# Altium PCB PCB1.PcbDoc
Units mm, origin at the board's own origin, x right, y up, seen from the top; angles counter-clockwise.
Board outline 95 x 95 mm, 2 copper layers (Top Layer, Bottom Layer); 15 components, 6 nets, 38 pads, 15 vias.
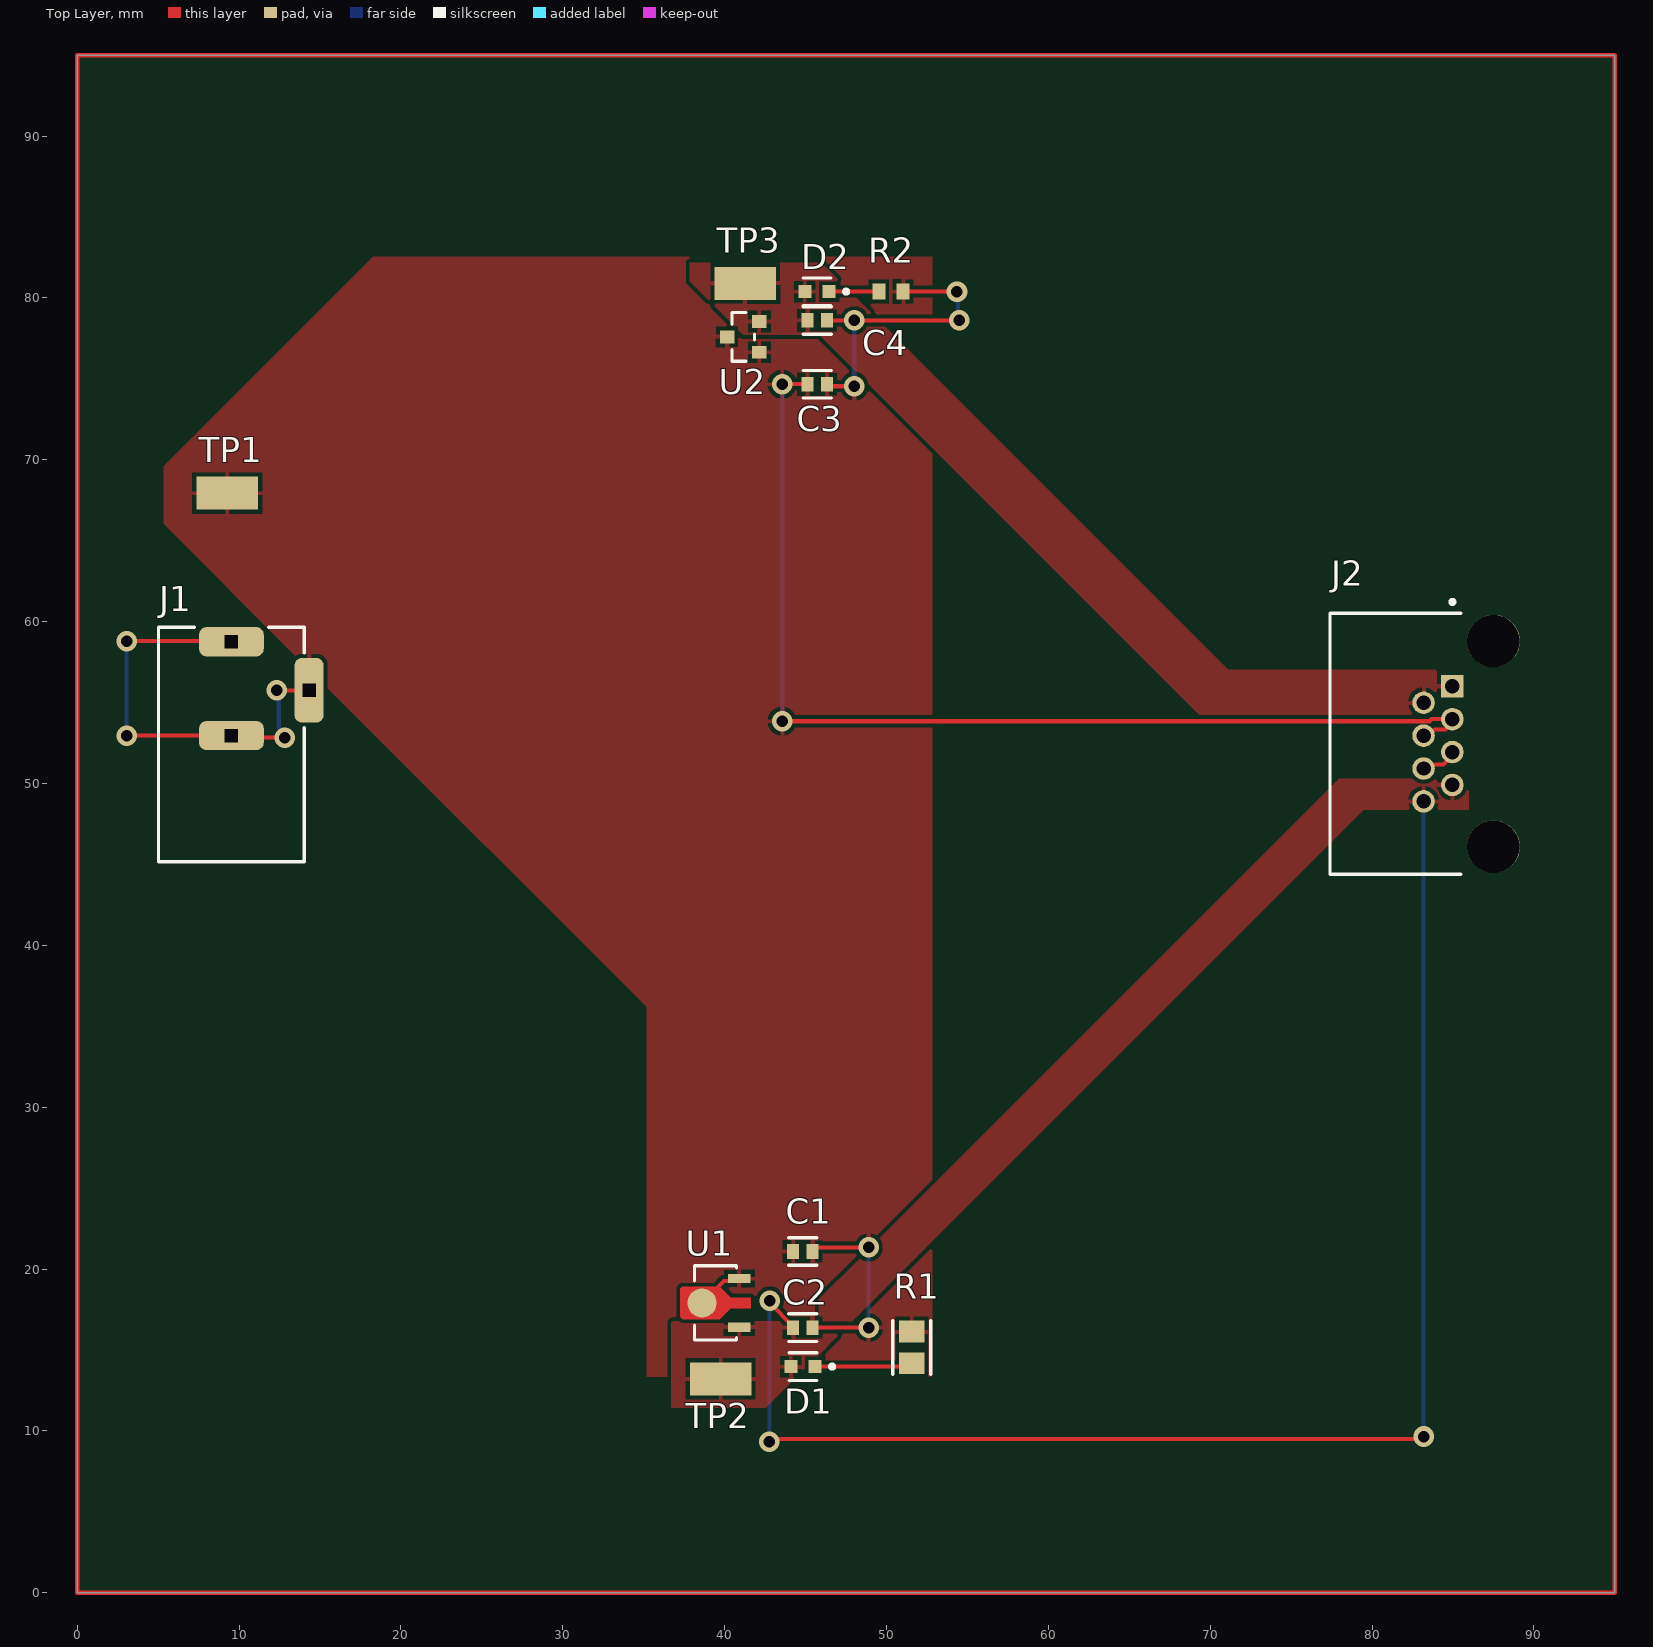
[diagram p0: Top Layer view]
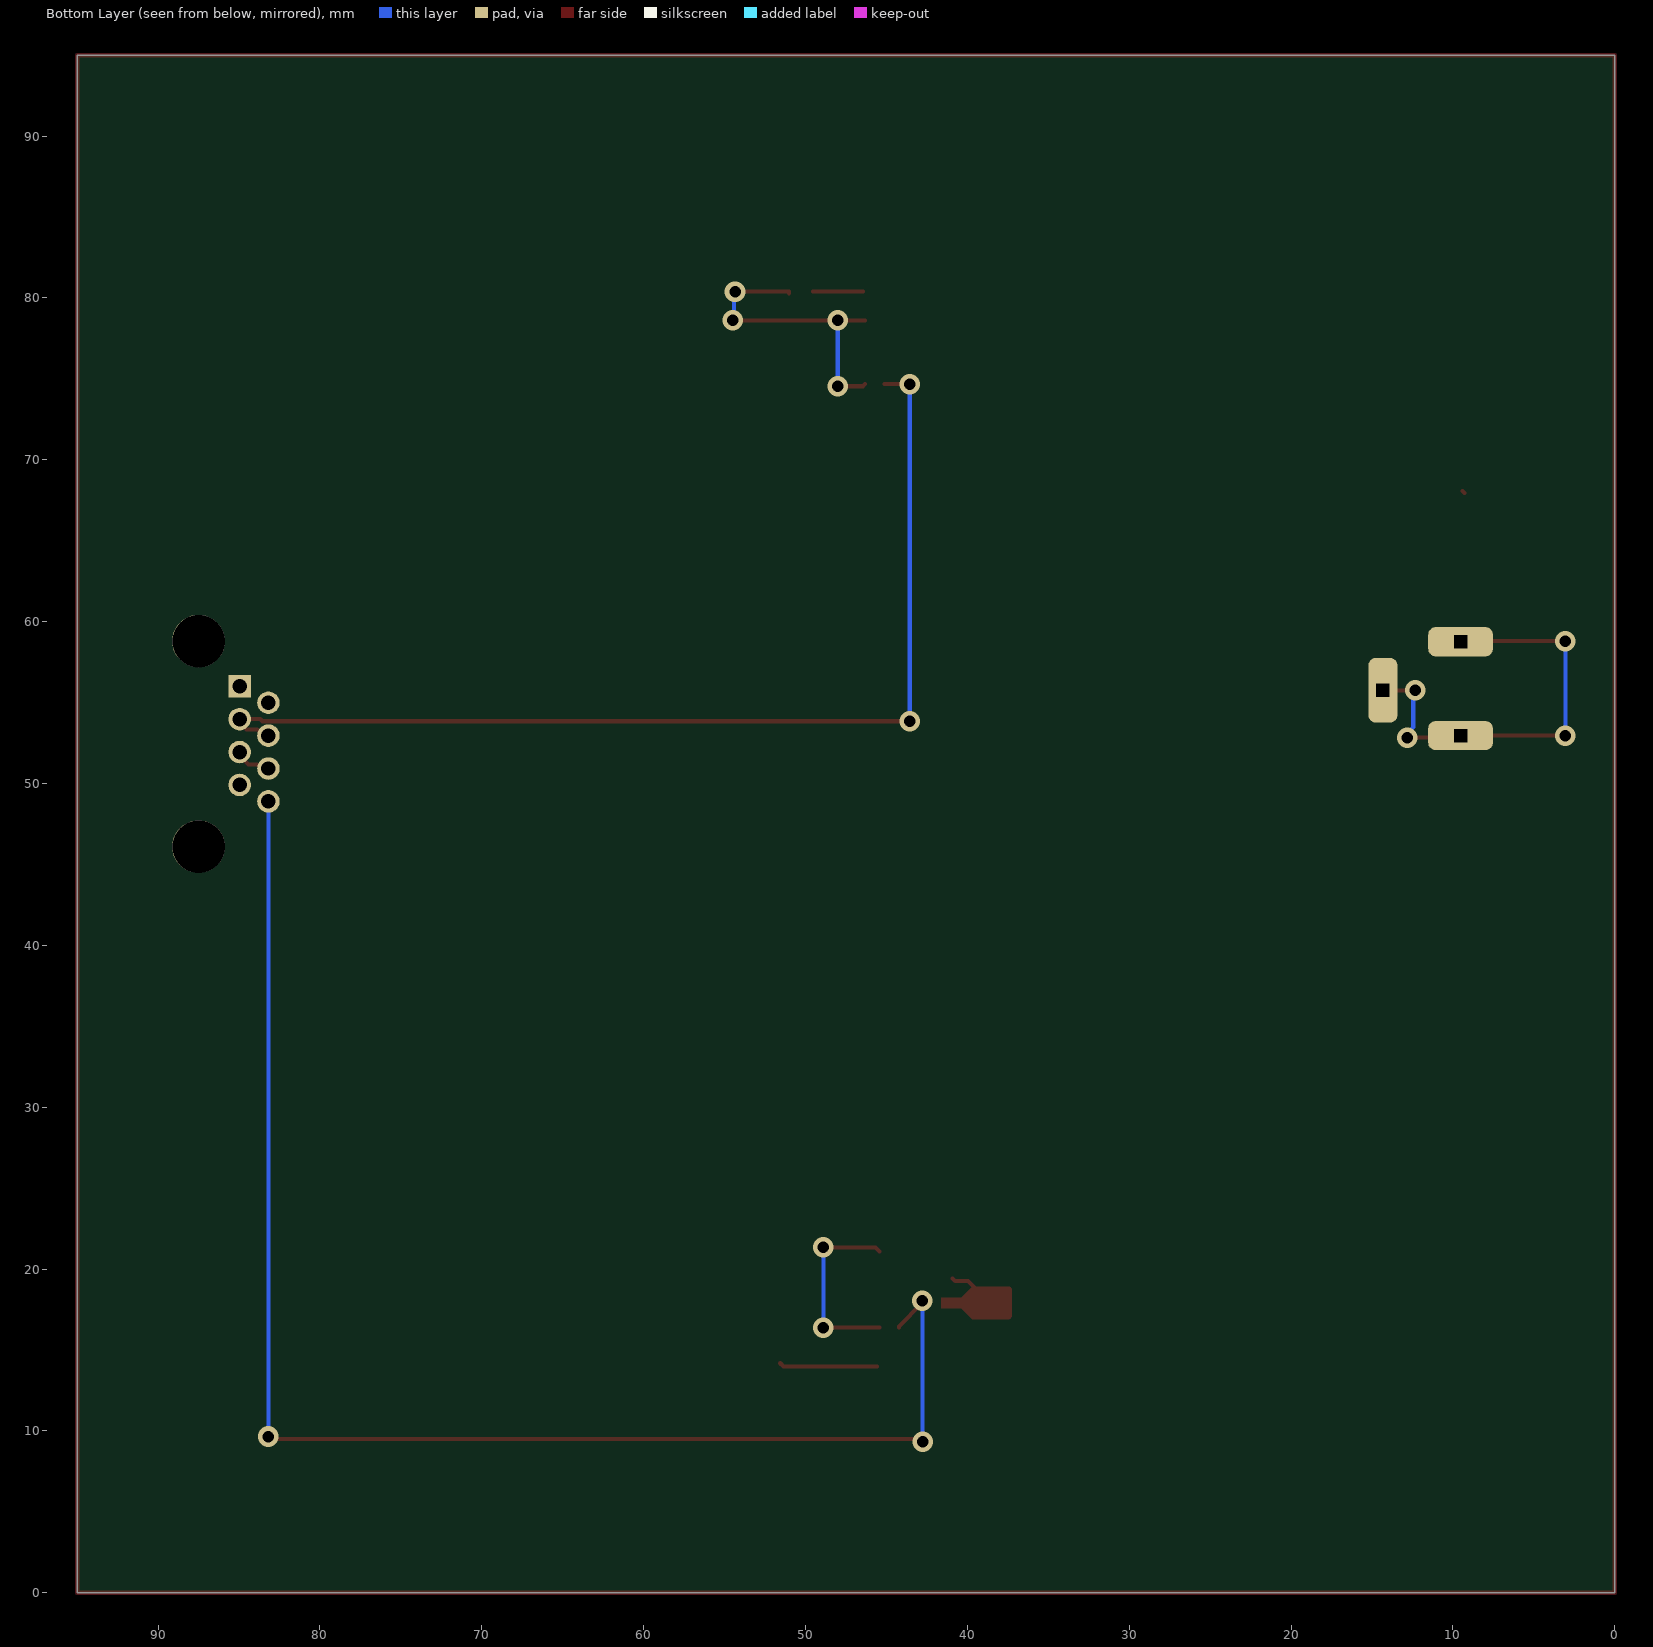
[diagram p1: Bottom Layer view, seen from below]
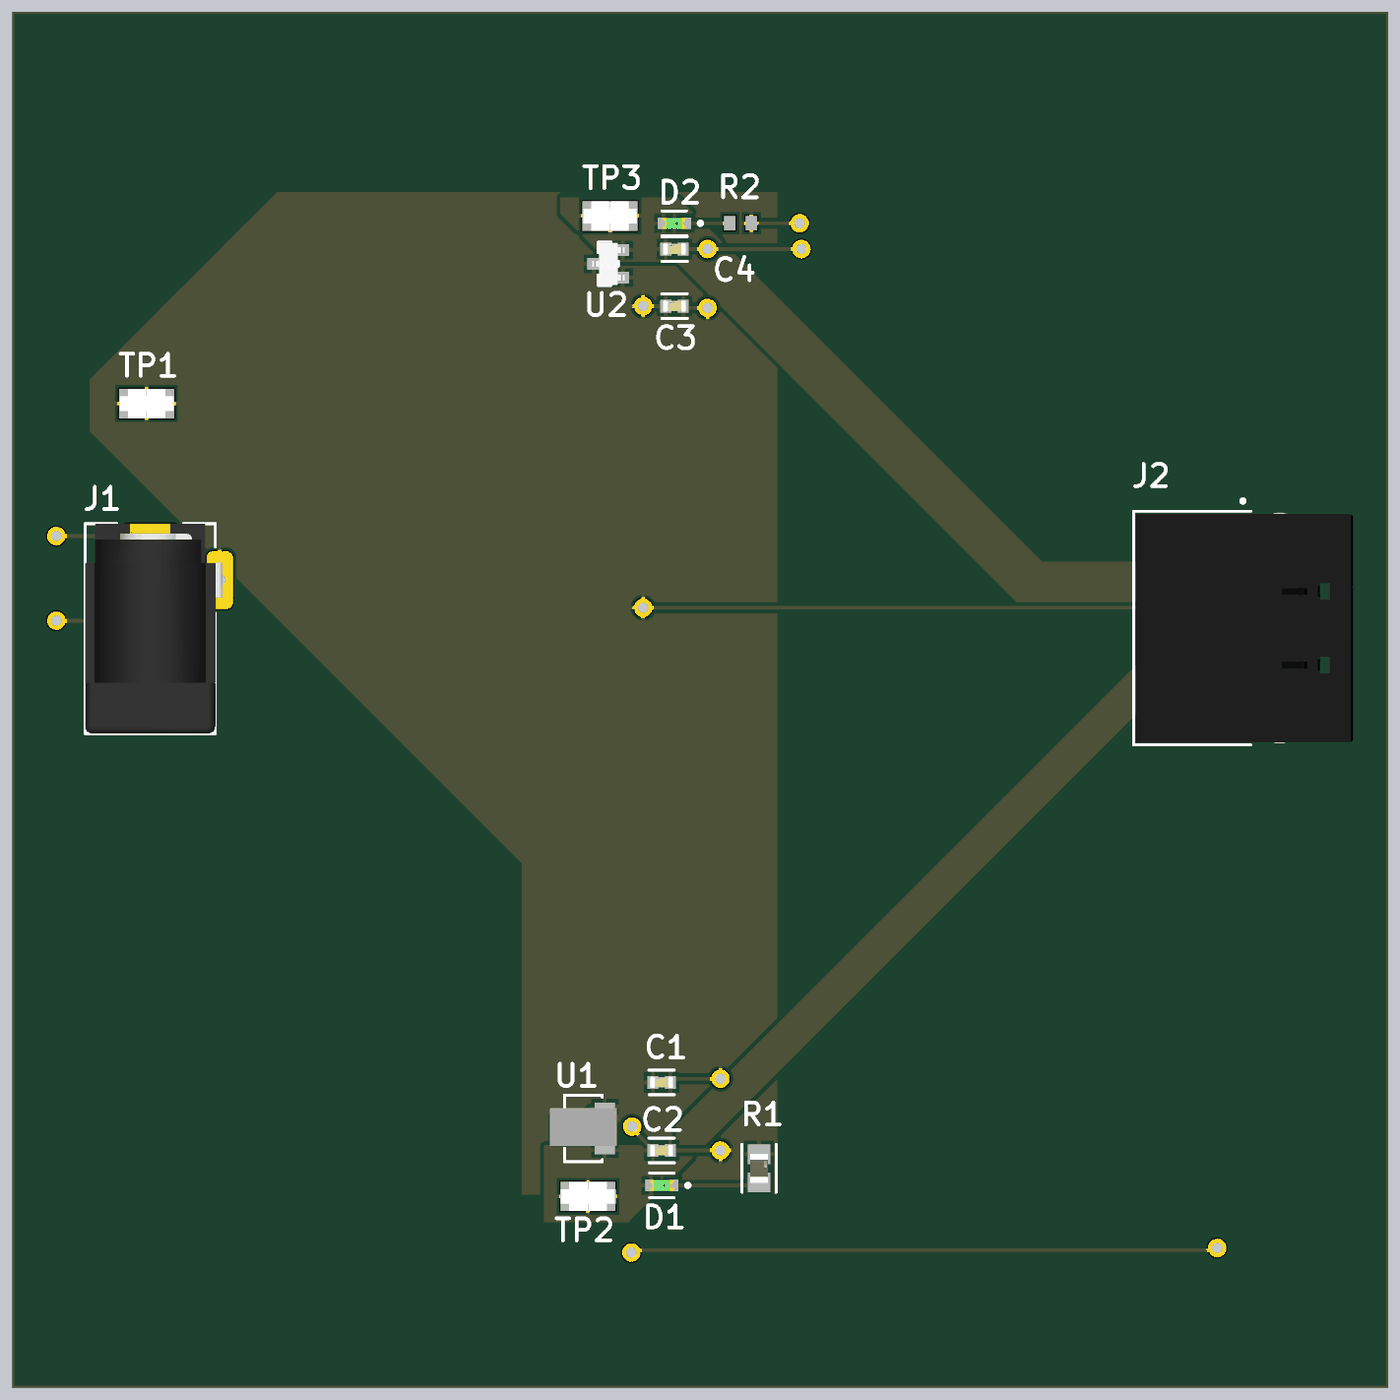
[diagram p2: 3D render of the assembled board from above, using the file's embedded part models]

## Layer stack, top to bottom
Top Solder: solder mask 0.0102, Solder Resist, Dk 3.5
Top Layer: signal copper 0.0356
Dielectric 1: dielectric 0.32, FR-4, Dk 4.8
Bottom Layer: signal copper 0.0356
Bottom Solder: solder mask 0.0102, Solder Resist, Dk 3.5

## Board outline
0,0 0,94.996 94.996,94.996 94.996,0

## Design rules (kind name [scope] priority, off if disabled: settings)
Clearance [All] p1: gap=0.254 ignorepadtopadclearanceinfootprint=FALSE except(0: Arc-Hole Track-Hole SMDPad-Hole THPad-Hole Via-Hole Fill-Hole Poly-Hole Region-Hole Text-Hole)
PolygonConnect [All] p1: connectstyle=Relief reliefconductorwidth=0.254 reliefentries=4 polygonreliefangle="90 Angle" airgapwidth=0.254
RoutingVias [All] p1: holewidth=0.711 width=1.27 viastyle="Through Hole" minholewidth=0.711 minwidth=1.27 maxholewidth=0.711 maxwidth=1.27
SolderMaskExpansion [All] p1: expansion=0.102 istentingtop=FALSE
Width [All] p1: maxlimit=0.254 minlimit=0.254 preferedwidth=0.254
30 further rules are at their usual default settings.

## Classes and differential pairs
component class Connectors: J2
component class Power_Supply_no_IC: J1
component class Buck_Converters: C1 C2 C3 C4 D1 D2 R1 R2 TP1 TP2 TP3 U1 U2

## Components (designator, comment, footprint, x,y, rotation, side; value= is the part's Value field where it differs from the comment)
C1 "C0603C104K5RACTU" FP-C0603C-CF-MFG 44.831,21.082 r0 top value="0.10 μF"
C2 "C0603C104K5RACTU" FP-C0603C-CF-MFG 44.831,16.383 r0 top value="0.10 μF"
C3 "C0603C104K5RACTU" FP-C0603C-CF-MFG 45.72,74.676 r0 top value="0.10 μF"
C4 "C0603C104K5RACTU" FP-C0603C-CF-MFG 45.72,78.613 r0 top value="0.10 μF"
D1 "LTST-C190GKT" FP-LTST-C190GKT-MFG 44.843,13.97 r180 top
D2 "LTST-C190GKT" FP-LTST-C190GKT-MFG 45.708,80.391 r180 top
J1 "694106301002" 694106301002 9.525,52.409 r0 top
J2 "RJHSE-5080" FP-RJHSE-5080-MFG 85.09,52.451 r90 top
R1 "RG2012P-202-B-T5" FP-RG2012-IPC_A 51.562,15.153 r90 top value=2kR
R2 "RT0603BRE071KL" RESC1608X55X25ML10T15 50.28,80.391 r180 top value=1kR
TP1 "BAT+" KSTN-5019_V 9.271,67.945 r0 top
TP2 "5V" KSTN-5019_V 39.751,13.208 r0 top
TP3 "3V3" KSTN-5019_V 41.275,80.899 r0 top
U1 "L78L05ACUTR" FP-SOT-89-7098166-MFG 39.433,18.007 r90 top
U2 "AP2120N-3.3TRG1" FP-SOT23-MFG 41.148,77.597 r180 top

## Footprints (in the part's own frame and the unit in brackets; to place one, negate y for a bottom-side part, rotate by r counter-clockwise, add the part's x,y. Pads: shape width x height; smd on the part's side, far side on the other; paste and mask are expansions set on the pad)
694106301002 [mm] "DC Power Jack Right Angled(6.4)"
  rrect50% 4x1.8 hole 0.8 square: 1(0,6.35) 2(0,0.55)
  rrect50% 1.8x4 hole 0.8 square: 3(4.8,3.35)
  silkscreen extent -4.5,-7.25 4.5,7.25, body extent -4.5,-7.25 5,7.25, height 10.75
FP-C0603C-CF-MFG [mm]
  rect 0.75x0.9 smd paste+0 mask+0: 1(-0.6,0) 2(0.6,0)
  silkscreen extent -0.87,-0.85 0.88,0.85, body extent -1.2,-0.6 1.2,0.6, height 0.25
FP-LTST-C190GKT-MFG [mm]
  rect 0.8x0.8 smd paste+0 mask+0: 1(-0.75,0) 2(0.75,0)
  silkscreen extent -1.92,-0.85 0.85,0.85, body extent -1.25,-0.55 1.25,0.55, height 0.25
FP-RG2012-IPC_A [mm]
  rect 1.355x1.556 smd paste+0 mask+0: 1(-0.976,0) 2(0.976,0)
  silkscreen extent -1.65,-1.18 1.65,1.18, body extent -2.15,-1.28 2.15,1.28, height 0.25
FP-RJHSE-5080-MFG [mm]
  rect 1.39x1.39 hole 0.89 paste-1000 mask+0: 1(3.556,0.127)
  round 1.39 hole 0.89 paste-1000 mask+0: 2(2.54,1.905) 3(1.524,0.127) 4(0.508,1.905) 5(-0.508,0.127) 6(-1.524,1.905) 7(-2.54,0.127) 8(-3.556,1.905)
  round 3.25 hole 3.25 unplated paste-1000 mask+0: ""(-6.35,-2.413) ""(6.35,-2.413)
  silkscreen extent -8.06,-0.41 8.89,7.68, body extent -8.16,-7.78 8.16,7.78, height 0.25
FP-SOT23-MFG [mm]
  rect 0.9x0.8 smd paste+0 mask+0: 1(-1,0.95) 2(-1,-0.95) 3(1,0)
  silkscreen extent -0.7,-1.5 0.7,1.5, body extent -1.55,-1.6 1.55,1.6, height 0.25
FP-SOT-89-7098166-MFG [mm]
  rect 0.57x1.4 smd paste+0 mask+0: 1(-1.6,-1.475) 3(1.4,-1.475)
  round 1.8 smd paste+0 mask+0: 2(-0.1,0.825)
  Top Layer region: -1.1,1.975 -1.1,-0.275 -0.425,-0.95 -0.425,-2.175 0.225,-2.175 0.225,-0.95 0.9,-0.275 0.9,1.975 0.873,2.075 0.8,2.148 0.7,2.175 0.7,2.175 -0.9,2.175 -1,2.148 -1.073,2.075 -1.1,1.975
  silkscreen extent -2.4,-1.3 2.2,1.3, body extent -2.5,-2.28 2.3,2.28, height 0.25
KSTN-5019_V [mm] "Test Point, 1-Leads, Body 3.81x2.03mm"
  rect 3.8x2.03 smd: 1(0,0)
  body extent -1.9,-1.01 1.9,1.02, height 2.29
RESC1608X55X25ML10T15 [mm] "Chip Resistor, 2-Leads, Body 1.60x0.80mm, IPC Low Density"
  rect 0.8x1 smd: 1(-0.75,0) 2(0.75,0)
  body extent -0.85,-0.45 0.85,0.45, height 0.55

## Part data
C1 C2 C3 C4: library part CMP-2006-03061-2, "CAP CER 0.1UF 50V X7R 0603", Capacitance="0.10 μF", Capacitor Type=Ceramic, Case/Package=0603, Manufacturer=KEMET, Max Operating Temperature=125°C, Min Operating Temperature=-55°C, Package=C0603C-CF, Package Shape=Rectangular, Package Style=SMTMeter, Rated DC Voltage (URdc)=50V, Supplier Part Number=399-C0603C104K5RAC7867CT-ND, Temperature="-55°C to +125°C", Temperature Characteristic=X7R, Temperature Coefficient=30ppm/°C, Temperature Range High=+125°C, Tolerance=0.1, Tolerance  (fill in as +-)=10%, Voltage Rating="50 V", Automotive=Yes, Automotive Grade="Grade 1", Category=Cap, ComponentLink1Description=https://datasheet.ciiva.com:443/pdfs/VipMasterIC/IC/KEME/KEME-S-A0008991654/KEME-S-A0008991654-1.pdf?src-supplier=IHS+Markit, ComponentLink1URL=https://datasheet.ciiva.com:443/pdfs/VipMasterIC/IC/KEME/KEME-S-A0008991654/KEME-S-A0008991654-1.pdf?src-supplier=IHS+Markit, ComponentLink2Description=Datasheet, ComponentLink2URL=https://api.kemet.com/component-edge/download/datasheet/C0603C100J5GACAUTO.pdf, Device Class L1="Passive Components", Device Class L2=Capacitors, Device Class L3="Ceramic Capacitors", Dielectric Material=Ceramic, Digikey Description="CAP CER 0.1UF 50V X7R 0603", Height=0.87mm, JESD-609 Code=e3, Lead Free=Yes, Length=1.6mm, Manufacturer Part Number=C0603C104K5RACTU, Material=Ceramic, Mounting Technology="Surface Mount", Multilayer=Yes, Octopart=https://octopart.com/c0603c104k5ractu-kemet-139244, Packaging="Tape and Reel", Pins=2, Pricing="1=0.11, 10=0.074, 50=0.0424, 100=0.0329, 500=0.02474, 1000=0.01944 (USD)", Reach SVHC Compliant=Yes, RoHS=TRUE, RoHS Compliant=Yes, Stock=4063890, Supplier=Digikey, Temperature Characteristics Code=X7R, Temperature Range Low=-55°C, Terminal Finish=Nickel, Termination=Wraparound, Tolerance (fill in as +-)=10%, Width=0.8mm
D1 D2: library part CMP-22017-000005-2, "LED GREEN CLEAR CHIP SMD", Case Code (Imperial)=0603, Case Code (Metric)=1608, Color=Green, Forward Current=30mA, Forward Voltage=2.1V, Lens Color=Colorless, Manufacturer="Vishay Lite-On", Max Operating Temperature=85°C, Min Operating Temperature=-55°C, Package Quantity=1, Power Dissipation=100mW, Reverse Voltage=5V, Supplier Part Number=160-1183-1-ND, Test Current=10mA, Voltage=2V, Case/Package=0603, Category=LEDs, Channels=1, Color@wavelength=Green, ComponentLink1Description=https://datasheet.ciiva.com:443/pdfs/VipMasterIC/IC/LITE/LITES10869/LITES10869-1.pdf?src-supplier=IHS+Markit, ComponentLink1URL=https://datasheet.ciiva.com:443/pdfs/VipMasterIC/IC/LITE/LITES10869/LITES10869-1.pdf?src-supplier=IHS+Markit, ComponentLink2Description=https://datasheet.ciiva.com/2109/ltst-c190gkt-2109985.pdf?src-supplier=Digikey, ComponentLink2URL=https://datasheet.ciiva.com/2109/ltst-c190gkt-2109985.pdf?src-supplier=Digikey, ComponentLink3Description=https://datasheet.ciiva.com/11775/0900766b80dc02a6-11775616.pdf?src-supplier=Rs, ComponentLink3URL=https://datasheet.ciiva.com/11775/0900766b80dc02a6-11775616.pdf?src-supplier=Rs, ComponentLink4Description=https://datasheet.ciiva.com/12403/lite-on-ltst-c190gkt-187204-12403884.pdf?src-supplier=Mouser, ComponentLink4URL=https://datasheet.ciiva.com/12403/lite-on-ltst-c190gkt-187204-12403884.pdf?src-supplier=Mouser, ComponentLink5Description=https://datasheet.ciiva.com/16392/lite-on20ltst-c190gkt-16392818.pdf?src-supplier=Future+Electronics, ComponentLink5URL=https://datasheet.ciiva.com/16392/lite-on20ltst-c190gkt-16392818.pdf?src-supplier=Future+Electronics, ComponentLink6Description=https://datasheet.ciiva.com/2109/ltst-c190gkt-2109986.pdf?src-supplier=Digikey, ComponentLink6URL=https://datasheet.ciiva.com/2109/ltst-c190gkt-2109986.pdf?src-supplier=Digikey, ComponentLink7Description=https://datasheet.ciiva.com/2109/ltst-c190gkt-2109987.pdf?src-supplier=Digikey, ComponentLink7URL=https://datasheet.ciiva.com/2109/ltst-c190gkt-2109987.pdf?src-supplier=Digikey, Depth=0.8mm, Dominant Wavelength=569nm, Height=0.8mm, Illumination Color=Green, JESD-609 Code=e3, Lead Free="Lead Free", Length=1.6mm, Lens Style=Clear, Lens Transparency=Clear, Luminous Intensity=6mcd, Luminous Intensity-Nom=6mcd, Manufacturer Part Number=LTST-C190GKT, Mount="Surface Mount", Mounting Technology="Surface Mount", Number of Elements=1, Number of LEDs=1, Number of Pins=2, Optoelectronic Device Type="SINGLE COLOR LED", Overall Height=0.8mm, Packaging="Tape and Reel", Pins=2, Power Rating=100mW, Pricing="1=0.24, 10=0.133, 100=0.0617, 500=0.05696, 1000=0.04462, 2000=0.04367 (USD)", Radiation Hardening=No, Reach SVHC Compliant=Yes, Reverse Voltage-Max=5V, RoHS=Yes, RoHS Compliant=Yes, Shape=Rectangular, Size=1.1mm, Stock=1403639, Supplier=Digikey, Terminal Finish=Tin, Terminal Pitch=1.5mm, Viewing Angle=130°, Wavelength=565nm, Width=0.8mm
J1: library part CMP-1502-00188-2, Color=Black, Current Rating=5A, Flammability Rating="UL94 V-0", Insulation Resistance=100MΩ, Manufacturer="Wurth Electronics", Max Operating Temperature=85°C, Min Operating Temperature=-40°C, Operating Supply Voltage=24V, Supplier Part Number=732-5930-ND, Voltage Rating (DC)=20V, Category="Power Connectors", ComponentLink1Description=https://datasheet.ciiva.com:443/pdfs/VipMasterIC/IC/MIDC/MIDC-S-A0001192814/MIDC-S-A0001192814-1.pdf?src-supplier=IHS+Markit, ComponentLink1URL=https://datasheet.ciiva.com:443/pdfs/VipMasterIC/IC/MIDC/MIDC-S-A0001192814/MIDC-S-A0001192814-1.pdf?src-supplier=IHS+Markit, ComponentLink2Description=http://www.mouser.com/ds/2/445/6941xx301002-469315.pdf?src-supplier=Mouser, ComponentLink2URL=http://www.mouser.com/ds/2/445/6941xx301002-469315.pdf?src-supplier=Mouser, ComponentLink3Description=http://www.farnell.com/cad/2130967.pdf?src-supplier=Element14, ComponentLink3URL=http://www.farnell.com/cad/2130967.pdf?src-supplier=Element14, ComponentLink4Description=https://katalog.we-online.de/em/datasheet/6941xx301002.pdf?src-supplier=Digikey, ComponentLink4URL=https://katalog.we-online.de/em/datasheet/6941xx301002.pdf?src-supplier=Digikey, Connector Type=Power, Contact Finish - Mating="NOT SPECIFIED", Contact Gender=Female, Contact Material="Gold, Tin", Contact Plating=Tin, Gender=Male, Height=11mm, Housing Material=Polyamide, Manufacturer Part Number=694106301002, Mount="Through Hole", NexarPartId=52676100, Number of Contacts=3, Packaging=Bulk, Pricing="1=1.02, 10=0.97, 50=0.86, 100=0.8, 500=0.69, 1000=0.59 (USD)", REACH SVHC=Unknown, Reach SVHC Compliant=Yes, RoHS=Compliant, RoHS Compliant=Yes, Shielding=Unshielded, Stock=12798, Supplier=Digikey, Termination="Through Hole", Voltage Rating=24V
J2: library part CMP-02366-000003-1, "CONN MOD JACK 8P8C R/A UNSHLD", Current Rating=1.5A, Flammability Rating="UL94 V-0", Insulation Color=Black, Manufacturer=Amphenol, Package=CONN_MOD_JACK, Supplier Part Number=RJHSE-5080-ND, Temperature="-55°C to +85°C", Temperature Range High=+85°C, Temperature Range Low=-55°C, Voltage Rating=125V, Automotive=No, Body Breadth=0.52inch, Body Depth=0.59inch, Body Length=0.62inch, Body/Shell Style=JACK, Category=Conn, ComponentLink1Description=https://datasheet.ciiva.com:443/pdfs/VipMasterIC/IC/AMPH/AMPH-S-A0001396201/AMPH-S-A0001290431-1.pdf?src-supplier=IHS+Markit, ComponentLink1URL=https://datasheet.ciiva.com:443/pdfs/VipMasterIC/IC/AMPH/AMPH-S-A0001396201/AMPH-S-A0001290431-1.pdf?src-supplier=IHS+Markit, ComponentLink2Description=Datasheet, ComponentLink2URL=https://cdn.amphenol-icc.com/media/wysiwyg/files/documentation/datasheet/inputoutput/io-modjack-rjhse.pdf, ComponentLink3Description=https://datasheet.ciiva.com/685/rjhse5080-685586.pdf?src-supplier=Digikey, ComponentLink3URL=https://datasheet.ciiva.com/685/rjhse5080-685586.pdf?src-supplier=Digikey, ComponentLink4Description=https://datasheet.ciiva.com/7629/1682821-7629402.pdf?src-supplier=Element14, ComponentLink4URL=https://datasheet.ciiva.com/7629/1682821-7629402.pdf?src-supplier=Element14, ComponentLink5Description=https://datasheet.ciiva.com/15171/getdatasheetpartid-643190-15171163.pdf?src-supplier=Verical, ComponentLink5URL=https://datasheet.ciiva.com/15171/getdatasheetpartid-643190-15171163.pdf?src-supplier=Verical, ComponentLink6Description=https://datasheet.ciiva.com/1432/1693748-1432448.pdf?src-supplier=Element14, ComponentLink6URL=https://datasheet.ciiva.com/1432/1693748-1432448.pdf?src-supplier=Element14, Conn Gender=Female, Conn Orientation="Right Angle", Connector Type="TELECOM AND DATACOM CONNECTOR", Contact Finish - Mating="GOLD (50) OVER NICKEL (50)", Contact Finish - Termination="Matte Tin (Sn)", Contact Gender=Female, Contact Material=Gold,Nickel, Contact Style="TELCOM, MODULAR", Device Class L1=Connectors, Device Class L2="Modular / Ethernet Connectors", Device Class L3=unset, Digikey Description="CONN MOD JACK 8P8C R/A UNSHLD", DIN Conformance=No, Empty Shell=No, Filter Feature=No, Footprint Url=https://cdn.amphenol-icc.com/media/wysiwyg/files/drawing/rjhse5080.pdf?__cf_chl_jschl_tk__=e349db0bbbb6188a39347cd5e541b92fa02c9719-1587748343-0-AW7tChdeHzRPLX9gSWj7WrKaXQoY9BsmT9Ek0h-T62M9y3Rs9iypFcOtkzb-6sGYQEjFE-jcoNciDETCOZrh1rYyOesac5SvYLoLwHIsHvF4AKBlx-MXmfZUVk9OTTJLqyQq2qMm0PFRLJpNcK0nrKResqOniRSYixG2sPTmOPraH-ULJFBDL602CHqcI9KKBgTq90Jh1OL2Td4moJ99rFsJRJ1Tk_uoxGe8ublcP_ARu-uLpWcQrBcwOcHDTAwL29DAwVaqcH7ta8Ks7WMlHmVl_pILeEDwT0bE9vu5Pa5S3PtNRF1leuFkgi_FMbUxTDulc5xzbXSfng8srUIV1lWXny5nx1fZJEUa_w97yKjffzBMxiWLWVN-V7-uqAaPbyv_m-wRyw5O25OZNyJOeGU, Height=0.535inch, IEC Conformance=No, Insulation Material=Thermoplastic, Is Female=yes, JESD-609 Code=e3, Lead Free=Yes, Manufacturer Part Number=RJHSE-5080, MIL Conformance=No, Mixed Contacts=No, Mounting Option 1=LOCKING, Mounting Style="RIGHT ANGLE", Mounting Technology=Panel,Board, Mouser Description="Modular Connectors / Ethernet Connectors R/A RJ45 NONSHIELDED 8 CONT NO LEDS", Number of Contacts=8, Number of Ports=1, Octopart=https://octopart.com/rjhse-5080-amphenol-45060, Option="General Purpose", PCB Contact Pattern=STAGGERED, Pitch=1.02mm, Plating Thickness=50uin, Pricing="1=1.03, 10=0.867, 36=0.83194, 72=0.81417, 108=0.7788, 252=0.70802, 504=0.6372, 1008=0.56641, 2520=0.51331 (USD)", Reach SVHC Compliant=Yes, Reference Standard=UL, Reliability=COMMERCIAL, RoHS=TRUE, RoHS Compliant=Yes, Shell Material=Polyethylene, Stock=69947, Supplier=Digikey, Terminal Length=0.1inch, Terminal Pitch=2.032mm, Termination=Solder
R1: library part CMP-2001-02825-2, "Automotive Metal Thin Film Chip Resistor, 0805, 2kΩ, 0.1%, 25ppm/°C, 0.125W, 150V", Case Code (Imperial)=0805, Case Code (Metric)=2012, Manufacturer=Susumu, Max Operating Temperature=155°C, Max Power Dissipation=125mW, Min Operating Temperature=-55°C, Package Height=0.4mm, Package Length=2mm, Package Quantity=5000, Package Style=SMTMeter, Package Width=1.25mm, Power=250mW, Power Rating=100mW, Rated Temperature=70°C, Resistance=2kR, Resistor Type="FIXED RESISTOR", Supplier Part Number=RG20P2.0KBCT-ND, Temperature Coefficient=25ppm/°C, Tolerance=0.1%, Voltage Rating=100V, Voltage Rating (DC)=150V, Additional Feature="ANTI-SULFUR, PRECISION", Case/Package=0805, Category="Chip SMD Resistors", ComponentLink1Description=https://datasheet.ciiva.com:443/pdfs/VipMasterIC/IC/SUSU/SUSU-S-A0004582566/SUSU-S-A0004582566-1.pdf?src-supplier=IHS+Markit, ComponentLink1URL=https://datasheet.ciiva.com:443/pdfs/VipMasterIC/IC/SUSU/SUSU-S-A0004582566/SUSU-S-A0004582566-1.pdf?src-supplier=IHS+Markit, ComponentLink2Description=https://datasheet.ciiva.com/26874/getdatasheetpartid-485593-26874939.pdf?src-supplier=Verical, ComponentLink2URL=https://datasheet.ciiva.com/26874/getdatasheetpartid-485593-26874939.pdf?src-supplier=Verical, Construction=Rectangular, Features="Automotive AEC-Q200", Height=0.4mm, JESD-609 Code=e3, Lead Free="Lead Free", Length=2mm, Manufacturer Part Number=RG2012P-202-B-T5, Mounting Technology="Surface Mount", Number of Terminations=2, Packaging="Tape and Reel", Pins=2, Pricing="1=0.2, 10=0.145, 50=0.1134, 100=0.1012, 500=0.07646, 1000=0.06737 (USD)", Reach SVHC Compliant=Yes, Reference Standard=AEC-Q200, RoHS=Yes, RoHS Compliant=Yes, Series=RG, Size Code=0805, Stock=228903, Supplier=Digikey, Technology="THIN FILM", Terminal Finish=Nickel, Termination=SMD/SMT, Width=1.25mm, Working Voltage=150V
R2: library part CMP-2000-04525-1, Case/Package=0603, Manufacturer=Yageo, Max Operating Temperature=155°C, Min Operating Temperature=-55°C, Package Height=0.45mm, Package Length=1.6mm, Package Style=SMTMeter, Package Width=0.8mm, Power=100mW, Rated Temperature=70°C, Resistor Type="FIXED RESISTOR", Supplier Part Number=YAG2314CT-ND, Temperature Coefficient=50ppm/°C, Tolerance=0.1%, Working Voltage=75V, Category="Chip SMD Resistors", ComponentLink1Description=https://datasheet.ciiva.com:443/pdfs/VipMasterIC/IC/YAGO/YAGO-S-A0008510989/YAGO-S-A0008510989-1.pdf?src-supplier=IHS+Markit, ComponentLink1URL=https://datasheet.ciiva.com:443/pdfs/VipMasterIC/IC/YAGO/YAGO-S-A0008510989/YAGO-S-A0008510989-1.pdf?src-supplier=IHS+Markit, ComponentLink2Description=https://datasheet.ciiva.com/2584/pyu-rt-1-to-0-05-rohs-l-5-2584317.pdf?src-supplier=Digikey, ComponentLink2URL=https://datasheet.ciiva.com/2584/pyu-rt-1-to-0-05-rohs-l-5-2584317.pdf?src-supplier=Digikey, Construction=Chip, Manufacturer Part Number=RT0603BRE071KL, Mounting Technology="Surface Mount", Packaging="Tape and Reel", Part Number=RT0603BRE071KL, Pins=2, Pricing="1=0.16, 10=0.12, 50=0.094, 100=0.084, 500=0.06376, 1000=0.05626 (USD)", Reach SVHC Compliant=Yes, RoHS=Yes, RoHS Compliant=Yes, Stock=31807, Supplier=Digikey, Technology="THIN FILM", Termination=Wraparound
TP1 TP2 TP3: library part CMP-1672-00008-1, "Test Point, 1 Position SMD, RoHS, Tape and Reel", Manufacturer="Keystone Electronics", Manufacturer Part Number=5019, Package Quantity=1000, Supplier Part Number=36-5019CT-ND, Category=Connectors, ComponentLink1Description="Manufacturer URL", ComponentLink1URL=http://www.keyelco.com/, ComponentLink2Description=Datasheet, ComponentLink2URL=http://www.keyelco.com/product-pdf.cfm?p=1357, ComponentLink3Description=https://datasheet.ciiva.com:443/pdfs/VipMasterIC/IC/KEYC/KEYC-S-A0003063693/KEYC-S-A0003063693-1.pdf?src-supplier=IHS+Markit, ComponentLink3URL=https://datasheet.ciiva.com:443/pdfs/VipMasterIC/IC/KEYC/KEYC-S-A0003063693/KEYC-S-A0003063693-1.pdf?src-supplier=IHS+Markit, ComponentLink4Description=https://datasheet.ciiva.com/16318/m60-2p61-16318395.pdf?src-supplier=Future+Electronics, ComponentLink4URL=https://datasheet.ciiva.com/16318/m60-2p61-16318395.pdf?src-supplier=Future+Electronics, ComponentLink5Description=https://datasheet.ciiva.com/14848/m60-2p61-14848438.pdf?src-supplier=Digikey, ComponentLink5URL=https://datasheet.ciiva.com/14848/m60-2p61-14848438.pdf?src-supplier=Digikey, ComponentLink6Description=https://datasheet.ciiva.com/14848/m60-2p61-14848439.pdf?src-supplier=Digikey, ComponentLink6URL=https://datasheet.ciiva.com/14848/m60-2p61-14848439.pdf?src-supplier=Digikey, ComponentLink7Description=https://datasheet.ciiva.com/14848/m60-2p61-14848437.pdf?src-supplier=Digikey, ComponentLink7URL=https://datasheet.ciiva.com/14848/m60-2p61-14848437.pdf?src-supplier=Digikey, ComponentLink8Description=https://datasheet.ciiva.com/16885/70182998-16885945.pdf?src-supplier=Allied+Electronics, ComponentLink8URL=https://datasheet.ciiva.com/16885/70182998-16885945.pdf?src-supplier=Allied+Electronics, Connector Type="Interconnection Device", Contact Plating=Silver, DatasheetVersion=03/2014, Mount="Surface Mount", Mounting Technology="Surface Mount", PackageDescription="1-Pin Surface Mount Device, Body 3.81 x 2.03 mm", PackageReference=5019, Packaging="Tape and Reel", Pins=1, Pricing="1=0.34, 25=0.2736, 100=0.2234, 250=0.20064, 500=0.19152 (USD)", Reach SVHC Compliant=Yes, RoHS=Yes, RoHS Compliant=Yes, RoHSCompliant=True, Stock=174520, Supplier=Digikey
U1: library part CMP-0244-00407-2, "IC REG LINEAR 5V 100MA SOT89-3", Case/Package=SOT-89, Dropout Voltage=1.7V, Input Voltage Absolute-Max=30V, Manufacturer=STMicroelectronics, Max Operating Temperature=125°C, Max Output Current=100mA, Max Supply Voltage=20V, Min Input Voltage=7V, Min Operating Temperature=0°C, Min Output Voltage=5V, Output Current1-Max=70mA, Output Voltage1-Max=5.25V, Output Voltage1-Min=4.75V, Output Voltage Accuracy=4%, Package Body Material=Plastic, Package Equivalence Code=TO-243, Package Quantity=1, Package Shape=Rectangular, Package Style="SMALL OUTLINEMeter", Peak Reflow Temperature (Cel)=260°C, Power Supply Rejection Ratio (PSRR)=49dB, Quiescent Current=6mA, Supplier Part Number=497-1183-1-ND, Time @ Peak Reflow Temperature-Max (s)=30s, Voltage Tolerance-Max=5%, Accuracy=4%, Adjustability=FIXED, Category="Voltage Regulators - Linear", Channels=1, ComponentLink1Description=https://datasheet.ciiva.com:443/pdfs/VipMasterIC/IC/SGST/SGST-S-A0002857926/SGST-S-A0002857926-1.pdf?src-supplier=IHS+Markit, ComponentLink1URL=https://datasheet.ciiva.com:443/pdfs/VipMasterIC/IC/SGST/SGST-S-A0002857926/SGST-S-A0002857926-1.pdf?src-supplier=IHS+Markit, ComponentLink2Description=https://datasheet.ciiva.com/1511/1868798-1511940.pdf?src-supplier=Element14, ComponentLink2URL=https://datasheet.ciiva.com/1511/1868798-1511940.pdf?src-supplier=Element14, ComponentLink3Description=https://datasheet.ciiva.com/22710/1868798-22710940.pdf?src-supplier=Element14, ComponentLink3URL=https://datasheet.ciiva.com/22710/1868798-22710940.pdf?src-supplier=Element14, ComponentLink4Description=https://datasheet.ciiva.com/7992/1868798-7992600.pdf?src-supplier=Element14, ComponentLink4URL=https://datasheet.ciiva.com/7992/1868798-7992600.pdf?src-supplier=Element14, ComponentLink5Description=https://datasheet.ciiva.com/2041/cd00000446-2041791.pdf?src-supplier=Digikey, ComponentLink5URL=https://datasheet.ciiva.com/2041/cd00000446-2041791.pdf?src-supplier=Digikey, ComponentLink6Description=https://datasheet.ciiva.com/2041/cd00000446-2041790.pdf?src-supplier=Digikey, ComponentLink6URL=https://datasheet.ciiva.com/2041/cd00000446-2041790.pdf?src-supplier=Digikey, ComponentLink7Description=https://datasheet.ciiva.com/2041/cd00000446-2041792.pdf?src-supplier=Digikey, ComponentLink7URL=https://datasheet.ciiva.com/2041/cd00000446-2041792.pdf?src-supplier=Digikey, ComponentLink8Description=https://datasheet.ciiva.com/4882/cd00000446-355303-4882429.pdf?src-supplier=Mouser, ComponentLink8URL=https://datasheet.ciiva.com/4882/cd00000446-355303-4882429.pdf?src-supplier=Mouser, ComponentLink9Description=https://datasheet.ciiva.com/16393/cd00000446-16393708.pdf?src-supplier=Future+Electronics, ComponentLink9URL=https://datasheet.ciiva.com/16393/cd00000446-16393708.pdf?src-supplier=Future+Electronics, Contact Plating=Tin, Dropout Voltage1-Nom=1.7V, Height=1.6mm, Height - Seated (Max)=1.6mm, JESD-30 Code=R-PSSO-F3, JESD-609 Code=e3, Lead Free="Lead Free", Length=4.6mm, Line Regulation-Max=0.15%, Load Regulation-Max=0.06%, Manufacturer Part Number=L78L05ACUTR, Max Input Voltage=30V, Moisture Sensitivity Level=1, Mount="Surface Mount", Nominal Output Voltage=5V, Number of Outputs=1, Number of Pins=3, Number of Regulators=1, Operating Temperature, TJ-Max=125°C, Operating Temperature, TJ-Min=0°C, Output Current=100mA, Output Type=Fixed, Output Voltage=5V, Output Voltage1-Nom=5V, Packaging="Tape and Reel", Pins=3, Polarity=Positive, Pricing="1=0.54, 10=0.464, 25=0.4328, 100=0.3461, 250=0.32144, 500=0.27198, 1000=0.21016 (USD)", Qualification Status="Not Qualified", Radiation Hardening=No, REACH SVHC="No SVHC", Reach SVHC Compliant=Yes, Regulator Type="FIXED POSITIVE SINGLE OUTPUT STANDARD REGULATOR", RoHS=Yes, RoHS Compliant=Yes, Stock=92237, Supplier=Digikey, Surface Mount=Yes, Technology=BIPOLAR, Terminal Finish=Tin, Terminal Form=Flat, Terminal Pitch=1.495mm, Terminal Position=SINGLE, Weight=0.004603oz, Width=2.6mm
U2: library part CMP-12756-000008-1, "IC REG LINEAR 3.3V 150MA SOT23", Case/Package=TSSOP, Dropout Voltage=300mV, Input Voltage Absolute-Max=6.5V, Manufacturer="Diodes Inc.", Max Junction Temp=+85°C, Max Supply Voltage=6V, Min Input Voltage=2V, Nominal Supply Current=25uA, Operating Temperature, TJ-Max=85°C, Operating Temperature, TJ-Min=-40°C, Output Current=150mA, Output Current1-Max=100mA, Output Voltage=3.3V, Output Voltage1-Max=3.366V, Output Voltage1-Min=3.234V, Package=SOT23, Package Body Material=Plastic, Package Equivalence Code=TO-236, Package Shape=Rectangular, Package Style="SMALL OUTLINE, THIN PROFILE, SHRINK PITCHMeter", Peak Reflow Temperature (Cel)=260°C, Supplier Part Number=AP2120N-3.3TRG1DICT-ND, Temperature="-40°C to +85°C", Time @ Peak Reflow Temperature-Max (s)=30s, Voltage Tolerance-Max=2%, Accuracy Percentage=2%, Adjustability=FIXED, Automotive=No, Category=IC, Channels=1, ComponentLink1Description=https://datasheet.ciiva.com:443/pdfs/VipMasterIC/IC/DIOD/DIOD-S-A0008513436/DIOD-S-A0008513436-1.pdf?src-supplier=IHS+Markit, ComponentLink1URL=https://datasheet.ciiva.com:443/pdfs/VipMasterIC/IC/DIOD/DIOD-S-A0008513436/DIOD-S-A0008513436-1.pdf?src-supplier=IHS+Markit, ComponentLink2Description=Datasheet, ComponentLink2URL=https://www.diodes.com/assets/Package-Files/SOT23.pdf, ComponentLink3Description=https://datasheet.ciiva.com/29569/ap2120-29569979.pdf?src-supplier=Digikey, ComponentLink3URL=https://datasheet.ciiva.com/29569/ap2120-29569979.pdf?src-supplier=Digikey, ComponentLink4Description=https://datasheet.ciiva.com/29569/ap2120-29569977.pdf?src-supplier=Digikey, ComponentLink4URL=https://datasheet.ciiva.com/29569/ap2120-29569977.pdf?src-supplier=Digikey, ComponentLink5Description=https://datasheet.ciiva.com/30016/ap2120-30016809.pdf?src-supplier=Avnet, ComponentLink5URL=https://datasheet.ciiva.com/30016/ap2120-30016809.pdf?src-supplier=Avnet, ComponentLink6Description=https://datasheet.ciiva.com/29569/ap2120-29569978.pdf?src-supplier=Digikey, ComponentLink6URL=https://datasheet.ciiva.com/29569/ap2120-29569978.pdf?src-supplier=Digikey, Device Class L1="Integrated Circuits (ICs)", Device Class L2="Power Management ICs", Device Class L3="Voltage Regulators - Linear", Digikey Description="IC REG LINEAR 3.3V 150MA SOT23", Dropout Voltage1-Max=300mV, Dropout Voltage1-Nom=300mV, Footprint Url=https://www.diodes.com/assets/Package-Files/SOT23.pdf, Height=1.1mm, Height - Seated (Max)=1.2mm, Ipc Land Pattern Name=SOT92P240X102-3, JESD-30 Code=R-PDSO-G3, JESD-609 Code=e3, Lead Free=Yes, Length=2.9mm, Line Regulation-Max=0.016%, Load Regulation-Max=0.04%, Manufacturer Part Number=AP2120N-3.3TRG1, Min Supply Voltage=2V, Moisture Sensitivity Level=3, Mouser Description="AP2120 Series 3.3 V 0.15 A Surface Mount CMOS LDO Regulator - SOT23", Number of Outputs=1, Octopart=https://octopart.com/ap2120n-3.3trg1-diodes+inc.-30954573, Output Type=Fixed, Output Voltage1-Nom=3.3V, Packaging="Tape and Reel", Pins=3, Pricing="1=0.38, 10=0.281, 25=0.246, 100=0.1592, 250=0.1318, 500=0.10544, 1000=0.08084 (USD)", Qualification Status="Not Qualified", Reach SVHC Compliant=Yes, Regulator Type="FIXED POSITIVE SINGLE OUTPUT LDO REGULATOR", RoHS=TRUE, RoHS Compliant=Yes, Standoff Height=0.013mm, Stock=949628, Supplier=Digikey, Surface Mount=Yes, Technology=CMOS, Temperature Range High=+85°C, Temperature Range Low=-40°C, Terminal Finish=Tin, Terminal Form="Gull Wing", Terminal Pitch=0.95mm, Terminal Position=DUAL, Width=1.3mm

## Via types
v1: diameter 1.27, hole 0.711, Top Layer to Bottom Layer, 15 vias

## Nets (pads, with @x,y where several pads share a name; then routed paths per layer and width w, separated by ;. In a path a pad name is that pad's centre, name@x,y a point inside that pad or via, vN(x,y) a via of type N, cw(c..) or ccw(c..) an arc to the next point about the centre after c; other vN are vias at no path point)
3V3: C4.1 D2.2 J2.1 J2.2 TP3.1 U2.2
5V: C2.1 D1.2 J2.7 J2.8 TP2.1 U1.1 | length 90.8
  Top Layer w0.254: v1(42.744,9.339) 42.9,9.496 83.029,9.496 v1(83.185,9.652) ; v1(42.799,18.034) 42.799,17.89 44.231,16.458 C2.1
  Bottom Layer w0.254: v1(42.744,9.339) 42.771,9.367 42.771,18.006 v1(42.799,18.034) ; v1(83.185,9.652) J2.8
BAT+: C1.1 C1.2 C2.2 C3.1 C3.2 C4.2 J1.1 J1.2 J1.3 J2.3 J2.4 R1.2 R2.1 TP1.1 U1.2 U1.3 U2.1 U2.3 | length 128
  Top Layer w0.254: v1(3.048,52.959) 9.398,52.959 9.525,52.832 v1(12.827,52.832) ; v1(3.048,58.801) 9.356,58.801 J1.1@9.398,58.759 ; TP1.1 TP1.1@9.398,68.072 ; v1(12.319,55.753) 14.319,55.753 J1.3 ; U1.2 39.95,19.249 40.75,19.249 U1.3 ; v1(43.561,53.848) 83.564,53.848 83.691,53.975 J2.3 84.963,53.765 84.538,53.34 83.873,53.34 83.492,52.959 J2.4 ; v1(43.561,74.676) C3.1 ; C2.2 v1(48.895,16.383) ; C1.2 45.431,21.088 45.679,21.336 v1(48.895,21.336) ; C3.2 46.447,74.549 v1(48.006,74.549) ; C4.2 v1(54.483,78.613) ; R2.1@51.03,80.291 R2.1 v1(54.356,80.391)
  Bottom Layer w0.254: v1(3.048,52.959) v1(3.048,58.801) ; J1.1@9.186,58.547 J1.1@9.398,58.759 ; v1(12.319,55.753) 12.446,55.626 12.446,53.488 12.827,53.107 v1(12.827,52.832) ; J1.3@14.198,55.759 J1.3@14.224,55.733 ; v1(43.561,53.848) v1(43.561,74.676) ; v1(48.006,74.549) v1(48.006,78.613) ; v1(48.895,16.383) v1(48.895,21.336) ; v1(54.356,80.391) 54.419,80.328 54.419,78.676 v1(54.483,78.613)
NetD1_1: D1.1 R1.1 | length 6.1
  Top Layer w0.254: D1.1 51.354,13.97 R1.1
NetD2_1: D2.1 R2.2 | length 3.1
  Top Layer w0.254: D2.1 R2.2
NetJ2_5: J2.5 J2.6 | length 2.3
  Top Layer w0.254: J2.6 83.402,51.144 83.865,51.144 83.902,51.181 84.414,51.181 84.963,51.73 J2.5
pads on no net: J2.
copper on no net: | length 380
  Top Layer w0.254: 0,0 94.996,0 94.996,94.996 0,94.996 0,0

## Polygon pours and split planes (outlines as drawn)
5V on Top Layer "5V_L01_P002" (solid, remove dead copper, pour order 2): 36.703,16.764 44.45,16.764 77.978,50.292 85.979,50.292 85.979,48.387 79.502,48.387 42.545,11.43 36.703,11.43
BAT+ on Top Layer "BAT+_L01_P003" (solid, remove dead copper, pour order 3): 5.334,69.596 18.288,82.55 52.832,82.55 52.832,13.462 52.705,13.335 35.179,13.335 35.179,36.195 5.334,66.04
3V3 on Top Layer "3V3_L01_P001" (solid, remove dead copper, pour order 1): 37.846,82.169 45.974,82.169 71.12,57.023 86.233,57.023 86.233,55.118 85.09,53.975 69.596,53.975 45.847,77.724 41.148,77.724 37.846,81.026 37.846,81.915